# EAGLE board Spring12_6_rev4 (EAGLE 6.1)
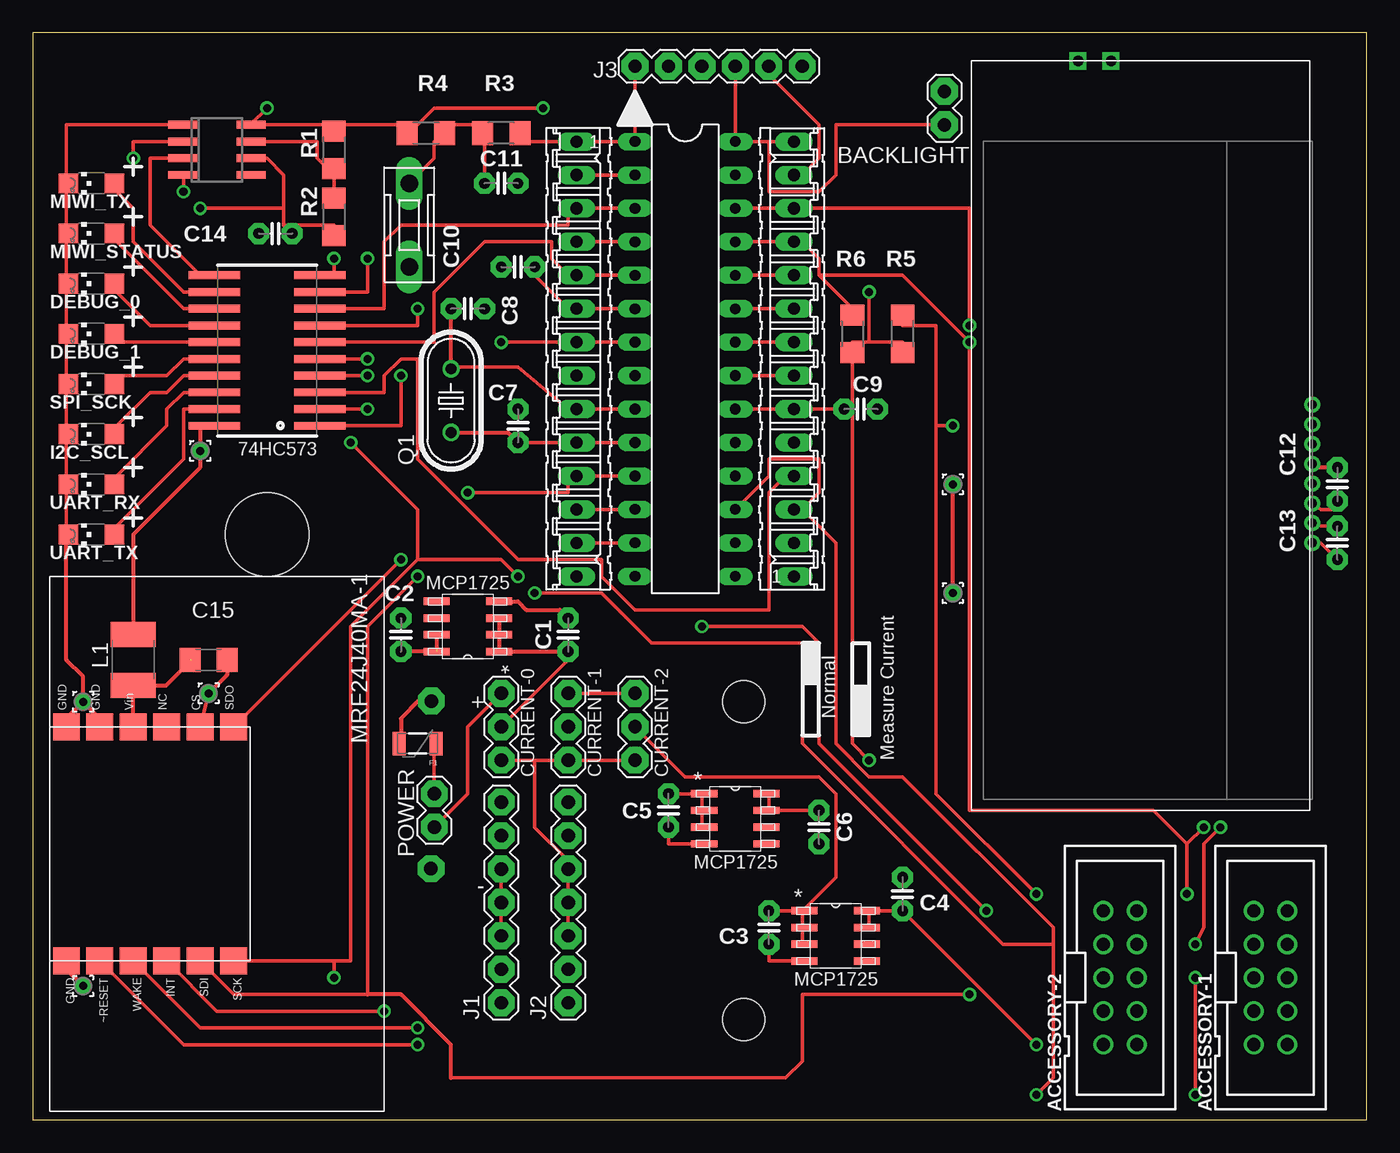
[diagram p0: board, top side]
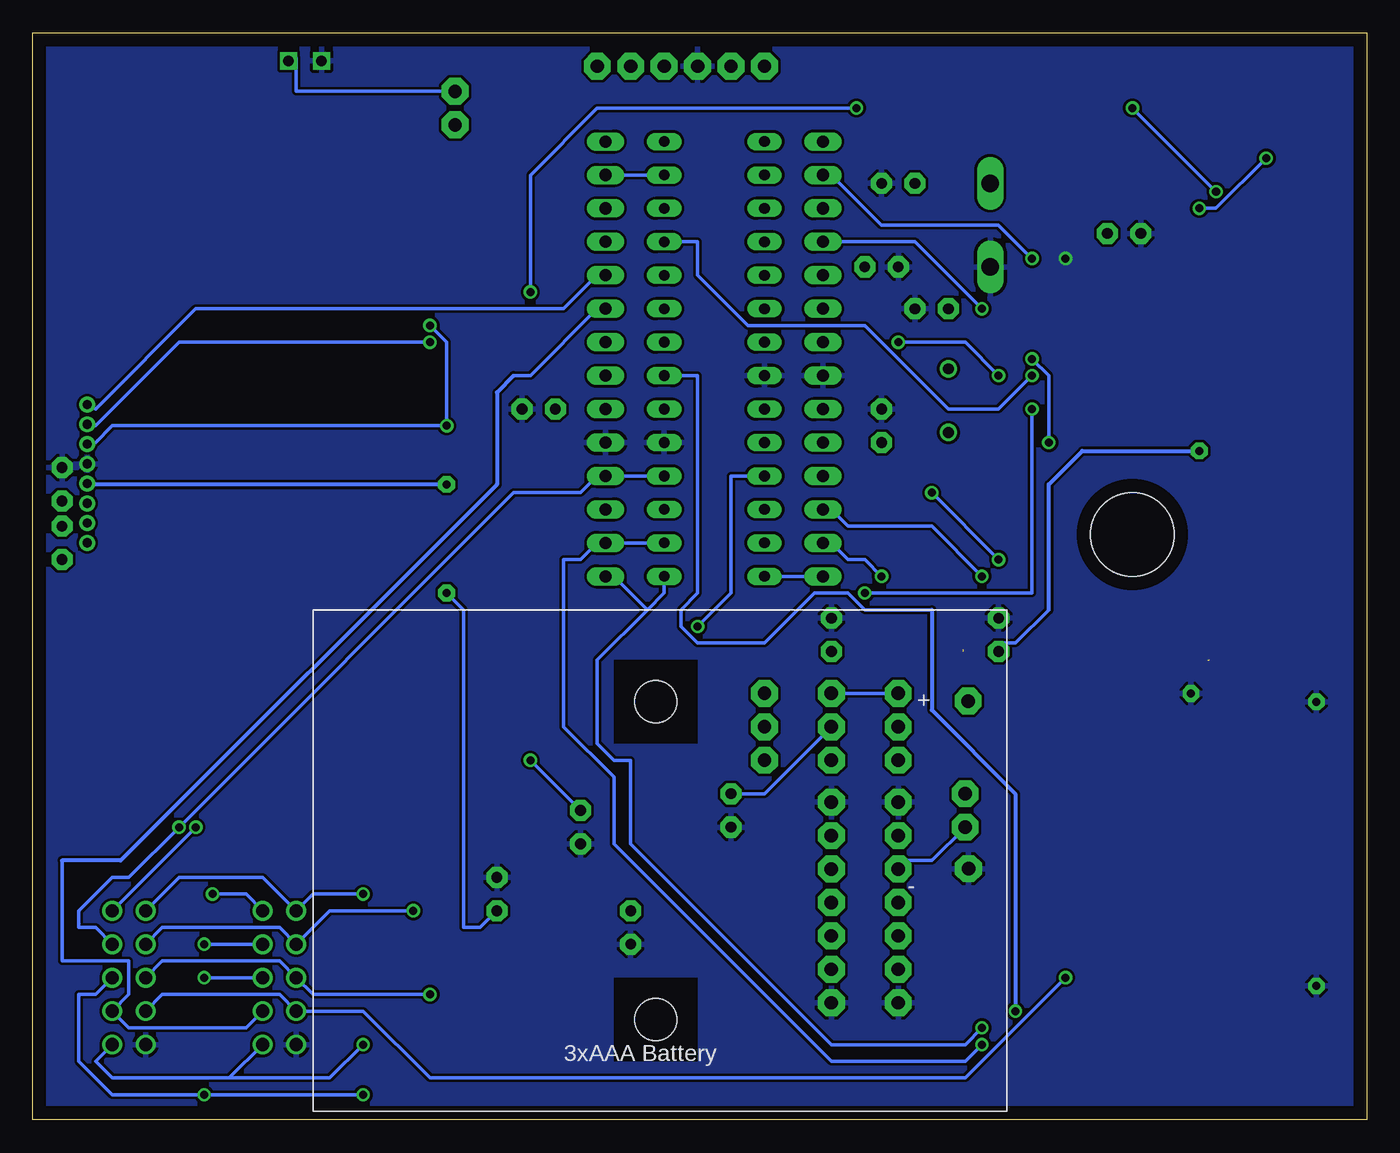
[diagram p1: board, bottom side, seen from below]

Size 101.27 x 82.54 mm. Coordinates in mm from the lower left corner, seen from the top.
Outline: 0,0 101.27,0 101.27,82.54 0,82.54 0,0
Copper layers (1*16): Top 0.035mm / dielectric 1.5mm / Bottom 0.035mm
Design rules: minimum track width 10mil, minimum drill 24mil, track to track 8mil, track to pad 8mil, pad to pad 8mil, via to via 8mil, smd to smd 8mil, copper to edge 40mil, drill to drill 8mil, minimum pad ring 10mil, minimum via ring 8mil, stop-mask expansion 4mil, vias tented up to drill 0mil, thermal gap 10mil
Holes 6.38 mm at 17.78,44.45
tRestrict: area 1.3,13.3 to 16.5,28.6; area 89.5,0.6 to 98.4,21; area 78.1,0.6 to 86.4,21; area 16.5,50.8 to 19.1,64.8; area 13.3,71.1 to 14.6,75.6; area 71.8,24.8 to 97.2,80; area 47.6,40 to 50.8,75.6; area 29.8,52.7 to 33.7,56.5; area 31.7,34.9 to 34.3,40; area 52.1,20.3 to 54.6,25.4; area 59.7,11.4 to 62.2,16.5
bRestrict: area 50.8,28.6 to 57.1,34.9; area 50.8,4.4 to 57.1,10.8
vRestrict: area 14,50.2 to 21.6,66; area 12.1,70.5 to 16.5,76.8; area 29.2,50.8 to 34.3,58.4; area 71.8,23.5 to 98.4,24.8; area 88.9,-0.6 to 99.1,21; area 77.5,-0.6 to 87,21; area 1.3,5.7 to 17.8,33.7

## Footprints (pad centres in the part's own frame; a part is rotated, then mirrored left to right if it is on the bottom)
SO20W = smd 0.6 x 3.9: P$1 -5.715,-4; P$2 -4.445,-4; P$3 -3.175,-4; P$4 -1.905,-4; P$5 -0.635,-4; P$6 0.635,-4; P$7 1.905,-4; P$8 3.175,-4; P$9 4.445,-4; P$10 5.715,-4; P$11 5.715,4; P$12 4.445,4; P$13 3.175,4; P$14 1.905,4; P$15 0.635,4; P$16 -0.635,4; P$17 -1.905,4; P$18 -3.175,4; P$19 -4.445,4; P$20 -5.715,4
2510-6002 = drill 1 pad 1.422: 1 -5.08,-1.27; 2 -5.08,1.27; 3 -2.54,-1.27; 4 -2.54,1.27; 5 0,-1.27; 6 0,1.27; 7 2.54,-1.27; 8 2.54,1.27; 9 5.08,-1.27; 10 5.08,1.27
MA02-1 = drill 1.016 pad 2.032 octagon: 1 -1.27,0; 2 1.27,0
2479-BATTERY = drill 1.016 pad 2.032 octagon: P$1 24.384,-7.01; P$2 24.359,-19.736 | hole 3.2: 0.635,4.445; 0.635,-19.685
C2.5-5 = drill 0.813 pad 1.6 octagon: 1 -1.27,0; 2 1.27,0
C1206 = smd 1.6 x 1.8: 1 -1.4,0; 2 1.4,0
LED1206 = smd 1.5 x 1.5: A 0,-1.75; C 0,1.75
PTC-1206 = smd 1 x 1.8: 1 -1.4,0; 2 1.4,0
SO08 = smd 0.6 x 2.2: 1 -1.905,-2.6; 2 -0.635,-2.6; 3 0.635,-2.6; 4 1.905,-2.6; 5 1.905,2.6; 6 0.635,2.6; 7 -0.635,2.6; 8 -1.905,2.6
MA07-1 = drill 1.016 pad 2.032 octagon: 1 -7.62,0; 2 -5.08,0; 3 -2.54,0; 4 0,0; 5 2.54,0; 6 5.08,0; 7 7.62,0
MA06-1 = drill 1.016 pad 2.032 octagon: 1 -6.35,0; 2 -3.81,0; 3 -1.27,0; 4 1.27,0; 5 3.81,0; 6 6.35,0
L1812 = smd 1.9 x 3.4: 1 -1.95,0; 2 1.95,0
HC49U-V = drill 0.813: 1 -2.413,0; 2 2.413,0
R1206 = smd 1.6 x 1.803: 1 -1.422,0; 2 1.422,0
SOIC8-N_MC = smd 1.981 x 0.559: 1 -2.362,1.905; 2 -2.362,0.635; 3 -2.362,-0.635; 4 -2.362,-1.905; 5 2.362,-1.905; 6 2.362,-0.635; 7 2.362,0.635; 8 2.362,1.905
PCB12 = smd 2.032 x 2.032: 1 -8.89,8.89; 2 -8.89,6.35; 3 -8.89,3.81; 4 -8.89,1.27; 5 -8.89,-1.27; 6 -8.89,-3.81; 7 8.89,-3.81; 8 8.89,-1.27; 9 8.89,1.27; 10 8.89,3.81; 11 8.89,6.35; 12 8.89,8.89
14P = drill 0.914 long: 1 -16.51,0; 2 -13.97,0; 3 -11.43,0; 4 -8.89,0; 5 -6.35,0; 6 -3.81,0; 7 -1.27,0; 8 1.27,0; 9 3.81,0; 10 6.35,0; 11 8.89,0; 12 11.43,0; 13 13.97,0; 14 16.51,0
MA03-1 = drill 1.016 pad 2.032 octagon: 1 -2.54,0; 2 0,0; 3 2.54,0
SW-MOM-PB = drill 1.346 long: 1 0,-3.81; 2 0,2.54
DIL28-3 = drill 0.813 long: 1 -16.51,-3.81; 2 -13.97,-3.81; 3 -11.43,-3.81; 4 -8.89,-3.81; 5 -6.35,-3.81; 6 -3.81,-3.81; 7 -1.27,-3.81; 8 1.27,-3.81; 9 3.81,-3.81; 10 6.35,-3.81; 11 8.89,-3.81; 12 11.43,-3.81; 13 13.97,-3.81; 14 16.51,-3.81; 15 16.51,3.81; 16 13.97,3.81; 17 11.43,3.81; 18 8.89,3.81; 19 6.35,3.81; 20 3.81,3.81; 21 1.27,3.81; 22 -1.27,3.81; 23 -3.81,3.81; 24 -6.35,3.81; 25 -8.89,3.81; 26 -11.43,3.81; 27 -13.97,3.81; 28 -16.51,3.81
SIL8-1.5 = drill 0.7: 1 10.5,0; 2 9,0; 3 7.5,0; 4 6,0; 5 4.5,0; 6 3,0; 7 1.5,0; 8 0,0 | drill 0.8 square: P$1 36.6,15.3; P$2 36.6,17.8
VIA = drill 0.61 pad 1.27 octagon: 1 0,0

## Placement (x,y rotation side)
74HC573  SOIC_20  [SO20W]  17.78,58.42 90 top
ACCESSORY-1  2510-6002  [2510-6002]  93.98,10.79 270 top
ACCESSORY-2  2510-6002  [2510-6002]  82.55,10.79 270 top
BACKLIGHT  MA02-1  [MA02-1]  69.22,76.83 90 top
BATT0  2479-BATTERY  [2479-BATTERY]  54.61,12.06 180 top
C1  10uF  [C2.5-5]  40.64,36.83 90 top
C2  10uF  [C2.5-5]  27.94,36.83 90 top
C3  10uF  [C2.5-5]  55.88,14.61 270 top
C4  10uF  [C2.5-5]  66.04,17.14 90 top
C5  10uF  [C2.5-5]  48.26,23.49 270 top
C6  10uF  [C2.5-5]  59.69,22.22 270 top
C7  18pF  [C2.5-5]  36.83,52.71 90 top
C8  18pF  [C2.5-5]  33.02,61.59 0 top
C9  0.1uF  [C2.5-5]  62.87,53.98 0 top
C10  10uF  [C2.5-5]  36.83,64.77 180 top
C11  0.1uF  [C2.5-5]  35.56,71.12 0 top
C12  1uF  [C2.5-5]  99.06,48.26 90 top
C13  1uF  [C2.5-5]  99.06,43.82 270 top
C14  10uF  [C2.5-5]  18.41,67.31 180 top
C15  100pF  [C1206]  13.34,34.93 0 top
DEBUG_0  LED-SMD-1206  [LED1206]  4.45,63.5 90 top
DEBUG_1  LED-SMD-1206  [LED1206]  4.45,59.69 90 top
F1  2.2A PTC  [PTC-1206]  29.21,28.57 180 top
I2C_SCL  LED-SMD-1206  [LED1206]  4.45,52.07 90 top
IC1  LM555D  [SO08]  13.97,73.66 270 top
J1  [MA07-1]  35.56,16.51 90 top
J2  [MA07-1]  40.64,16.51 90 top
J3  PICKIT  [MA06-1]  52.07,80.01 0 top
L1  10nH  [L1812]  7.62,34.93 90 top
MIWI_STATUS  LED-SMD-1206  [LED1206]  4.45,67.31 90 top
MIWI_TX  LED-SMD-1206  [LED1206]  4.45,71.12 90 top
POWER  MA02-1  [MA02-1]  30.48,23.49 270 top
Q1  20MHz  [HC49U-V]  31.75,54.61 270 top
R1  510  [R1206]  22.86,73.66 90 top
R2  1k  [R1206]  22.86,68.58 90 top
R3  470  [R1206]  35.56,74.93 0 top
R4  10k  [R1206]  29.84,74.93 180 top
R5  10K  [R1206]  66.04,59.69 270 top
R6  10K  [R1206]  62.23,59.69 90 top
REG0  MCP1725-XXXXX/SN  [SOIC8-N_MC]  53.34,22.86 0 top
REG1  MCP1725-XXXXX/SN  [SOIC8-N_MC]  33.02,37.47 180 top
REG2  MCP1725-XXXXX/SN  [SOIC8-N_MC]  60.96,13.97 0 top
RF0  MRF24J40MA  [PCB12]  11.43,20.95 90 top
SL1  [14P]  57.78,57.79 90 top
SL2  [14P]  41.27,57.79 270 top
SPI_SCK  LED-SMD-1206  [LED1206]  4.45,55.88 90 top
SV3  [MA03-1]  40.64,29.84 90 top
SV4  [MA03-1]  35.56,29.84 90 top
SV5  [MA03-1]  45.72,29.84 90 top
SW0  SW-PB-MOM  [SW-MOM-PB]  28.57,68.58 0 top
U$1  PIC18F26J50  [DIL28-3]  49.53,57.79 270 top
U$2  NHD-C0216CIZ-FSW-FBW-3V3  [SIL8-1.5]  97.16,43.82 90 top
U$3  VIA  [VIA]  69.85,48.26 0 top
U$4  VIA  [VIA]  69.85,40.01 0 top
U$5  VIA  [VIA]  12.7,50.8 0 top
U$18  VIA  [VIA]  3.81,10.16 0 top
U$19  VIA  [VIA]  3.81,31.75 0 top
U$20  VIA  [VIA]  13.34,32.39 0 top
UART_RX  LED-SMD-1206  [LED1206]  4.45,48.26 90 top
UART_TX  LED-SMD-1206  [LED1206]  4.45,44.45 90 top

## Library data of the parts
74HC573 = SparkFun
ACCESSORY-1 ACCESSORY-2 C1-C7 C14 DEBUG_0 DEBUG_1 I2C_SCL MIWI_STATUS MIWI_TX R1-R6 SPI_SCK U$3-U$5 U$18-U$20 UART_RX UART_TX = 4534_I2C2
BACKLIGHT IC1 J1-J3 POWER SW0 U$1 = 4534
BATT0 RF0 = 4534_Node_Board
C8-C13 = 4534_I2C2; DIGIKEY: 490-3632-ND
C15 = rcl; MOUSER: 810-CGA5C4C0G2J101J
F1 = SparkFun; DIGIKEY: F3366CT-ND; IHOLD: 1.10 A; ITRIP: 2.2A
L1 = rcl; MOUSER: 70-IMC1812BN100K
Q1 = crystal; DIGIKEY: XC1723-ND; OC_FARNELL: 1666969; OC_NEWARK: unknown
REG0 REG1 REG2 = 4534_Node_Board; NEWARK: MCP1725-3002E/SN
SL1 SL2 = con-amp-quick; OC_FARNELL: unknown; OC_NEWARK: unknown
SV3-SV5 = 4534; OC_FARNELL: unknown; OC_NEWARK: unknown
U$2 = nhd-cog

## Nets
BATT: BATT0.P$2 F1.2
CURRENT: J2.3 J2.4 J2.5 SV3.1 SV4.1 SV5.1
DEBUG_0: 74HC573.P$7 SL2.4 U$1.4
DEBUG_1: 74HC573.P$6 SL2.5 U$1.5
GPIO: ACCESSORY-1.8 ACCESSORY-2.8 SL1.9 U$1.23
I2C_SCL: 74HC573.P$4 ACCESSORY-1.2 ACCESSORY-2.2 R6.2 SL1.11 U$1.25 U$2.2
I2C_SDA: ACCESSORY-1.1 ACCESSORY-2.1 R5.1 SL1.12 U$1.26 U$2.3
LATCH_ENABLE: 74HC573.P$11 IC1.3
LCD_RESET: SL1.10 U$1.24 U$2.1
MCLR: J3.1 R3.2 SL2.1 U$1.1
MIWI-VDD: C15.1 L1.1 RF0.10
MIWI_STATUS: 74HC573.P$8 SL2.3 U$1.3
MIWI_TX: 74HC573.P$9 SL2.2 U$1.2
MRF-INT: RF0.4 SL1.7 U$1.21
MRF-RESET: RF0.2 SL1.2 U$1.16
MRF-WAKE: RF0.3 SL1.1 U$1.15
N$1: BACKLIGHT.2 U$2.P$1
N$2: IC1.7 R1.1 R2.2
N$3: C14.1 IC1.2 IC1.6 R2.1
N$6: C11.1 R3.1 R4.1 SW0.2
N$7: J1.6
N$8: C12.1 U$2.6
N$9: C13.1 U$2.7
N$10: C13.2 U$2.8
N$12: F1.1 POWER.1
N$14: J1.2
N$17: J2.6
N$21: J2.2
OSC1: C8.1 Q1.1 SL2.9 U$1.9
OSC2: C7.1 Q1.2 SL2.10 U$1.10
PGC: J3.5 SL1.13 U$1.27
PGD: BACKLIGHT.1 J3.4 SL1.14 U$1.28
PICKIT-AUX: J3.6
PICKIT-VDD: J3.2
PWM-0: 74HC573.P$1 SL2.7 U$1.7
Q0: 74HC573.P$19 UART_TX.A
Q1: 74HC573.P$18 UART_RX.A
Q2: 74HC573.P$17 I2C_SCL.A
Q3: 74HC573.P$16 SPI_SCK.A
Q4: 74HC573.P$15 DEBUG_1.A
Q5: 74HC573.P$14 DEBUG_0.A
Q6: 74HC573.P$13 MIWI_STATUS.A
Q7: 74HC573.P$12 MIWI_TX.A
SPI_MISO: ACCESSORY-1.3 ACCESSORY-2.3 RF0.7 SL2.11 U$1.11
SPI_MOSI: ACCESSORY-1.5 ACCESSORY-2.5 RF0.5 SL2.12 U$1.12
SPI_SCK: 74HC573.P$5 ACCESSORY-1.7 ACCESSORY-2.7 RF0.6 SL2.13 U$1.13
UART_RX: 74HC573.P$3 ACCESSORY-1.4 ACCESSORY-2.4 SL1.4 U$1.18
UART_TX: 74HC573.P$2 ACCESSORY-1.6 ACCESSORY-2.6 SL1.3 U$1.17
UNUSED-0: SL1.8 U$1.22
UNUSED-1: SL2.14 U$1.14
VCC_BATT: J1.3 J1.4 J1.5 POWER.2 SV3.3 SV4.3 SV5.3
VCC_REG0: C5.1 REG0.1 REG0.2 REG0.3 SV3.2
VCC_REG1: C1.1 REG1.1 REG1.2 REG1.3 SV4.2
VCC_REG2: C3.1 REG2.1 REG2.2 REG2.3 SV5.2
VDD_ACC: ACCESSORY-1.10 ACCESSORY-2.10 C4.1 REG2.7 REG2.8 U$2.5 U$3.1 U$4.1
VDD_MIWI: 74HC573.P$20 C2.1 L1.2 REG1.7 REG1.8 U$5.1
VDD_PIC: C6.1 C9.1 IC1.4 IC1.8 R1.2 R4.2 R5.2 R6.1 REG0.7 REG0.8 SL1.6 U$1.20
VDDCORE: C10.1 SL2.6 U$1.6
VSS: 74HC573.P$10 ACCESSORY-1.9 ACCESSORY-2.9 BATT0.P$1 C1.2 C2.2 C3.2 C4.2 C5.2 C6.2 C7.2 C8.2 C9.2 C10.2 C11.2 C12.2 C14.2 C15.2 DEBUG_0.C DEBUG_1.C I2C_SCL.C IC1.1 J1.1 J1.7 J2.1 J2.7 J3.3 MIWI_STATUS.C MIWI_TX.C REG0.4 REG1.4 REG2.4 RF0.1 RF0.8 RF0.11 RF0.12 SL1.5 SL2.8 SPI_SCK.C SW0.1 U$1.8 U$1.19 U$2.4 U$2.P$2 U$18.1 U$19.1 U$20.1 UART_RX.C UART_TX.C

## Tracks (layer width: path | path; a pad name or v marks a point on that pad's centre or on a via)
BATT
  Top 0.254: 27.94,28.57 F1.2
  Top 0.305: BATT0.P$2 29.26,31.8 27.94,30.48 27.94,28.57
CURRENT
  Top 0.254: J2.3 J2.4 J2.5 40.64,19.68 38.1,22.22 38.1,27.3 | 38.1,27.3 SV3.1 SV5.1 | 38.1,27.3 SV4.1
DEBUG_0  (via drill 0.61)
  Top 0.254: SL2.4 U$1.4 | 74HC573.P$7 29.21,60.33 v29.21,61.59
  Bottom 0.254: v29.21,61.59 34.29,66.67 SL2.4
DEBUG_1
  Top 0.254: U$1.5 SL2.5 40.64,64.13 39.37,65.41 39.37,66.67 34.29,66.67 30.48,62.87 30.48,59.05 74HC573.P$6
GPIO
  Top 0.254: SL1.9 U$1.23
  Bottom 0.254: ACCESSORY-2.8 85.09,6.99 93.98,6.99 ACCESSORY-1.8 93.98,9.53 93.98,12.06 99.06,12.06 99.06,19.68 | 64.77,56.52 63.5,56.52 58.42,61.59 SL1.9
  Bottom 0.305: 64.77,56.52 66.04,55.25 66.04,48.26 94.61,19.68 99.06,19.68
I2C_SCL  (via drill 0.61)
  Top 0.254: 59.69,64.13 62.23,61.59 R6.2 | 59.69,64.13 59.69,65.41 58.42,66.67 SL1.11 U$1.25 | 59.69,64.13 66.04,64.13 v71.12,59.05 71.12,23.49 85.09,23.49 87.63,20.95 | 87.63,20.95 v87.63,17.14 | 87.63,20.95 v88.9,22.22 | v25.4,56.52 74HC573.P$4
  Bottom 0.254: v71.12,59.05 90.17,59.05 96.52,52.71 U$2.2 | ACCESSORY-2.2 85.09,17.14 v87.63,17.14 | v88.9,22.22 ACCESSORY-1.2 | v25.4,56.52 27.94,53.98 31.75,53.98 38.1,60.33 46.99,60.33 50.8,64.13 50.8,66.67 U$1.25
I2C_SDA  (via drill 0.61)
  Top 0.254: U$1.26 SL1.12 71.12,69.21 v71.12,60.33 | 68.58,52.71 68.58,24.76 v76.2,17.14 | 68.58,52.71 68.58,60.33 66.04,60.33 R5.1 | 68.58,52.71 v69.85,52.71
  Bottom 0.254: v76.2,17.14 80.01,17.14 ACCESSORY-2.1 83.82,18.41 90.17,18.41 ACCESSORY-1.1 | U$2.3 96.52,51.44 95.25,52.71 v69.85,52.71 69.85,59.05 v71.12,60.33
LATCH_ENABLE
  Top 0.254: 11.43,73.02 IC1.3 8.89,73.02 8.89,67.94 12.7,64.13 74HC573.P$11
LCD_RESET
  Top 0.254: SL1.10 U$1.24
  Bottom 0.254: U$2.1 96.52,53.98 88.9,61.59 60.96,61.59 58.42,64.13 SL1.10
MCLR
  Top 0.254: R3.2 36.83,74.3 SL2.1 U$1.1 J3.1
MIWI-VDD  (1 unrouted)
  Top 0.305: RF0.10 L1.1 | L1.1 7.62,33.02 | L1.1 10.12,32.98 12.06,34.93
MIWI_STATUS
  Top 0.254: U$1.3 SL2.3 40.64,69.21 40.64,67.94 27.94,67.94 26.67,66.67 26.67,61.59 74HC573.P$8
MIWI_TX  (via drill 0.61)
  Top 0.254: SL2.2 U$1.2 | 74HC573.P$9 25.4,62.87 v25.4,65.41
  Bottom 0.254: v25.4,65.41 27.94,67.94 36.83,67.94 40.64,71.75 SL2.2
MRF-INT  (via drill 0.61)
  Top 0.254: RF0.4 13.97,8.26 v26.67,8.26 | U$1.21 SL1.7
  Bottom 0.254: 33.02,38.73 38.1,38.73 39.37,40.01 41.91,40.01 45.72,36.2 50.8,36.2 52.07,37.47 52.07,38.73 50.8,40.01 50.8,56.52 U$1.21
  Bottom 0.305: v26.67,8.26 26.67,24.76 33.02,31.11 33.02,38.73
MRF-RESET  (via drill 0.61)
  Top 0.254: RF0.2 11.43,5.71 v29.21,5.71
  Bottom 0.254: v29.21,5.71 30.48,4.45 40.64,4.45 57.15,20.95 57.15,26.04 60.96,29.84 60.96,42.55 59.69,42.55 58.42,43.82 SL1.2 U$1.16
MRF-WAKE  (via drill 0.61)
  Top 0.254: RF0.3 12.7,6.99 v29.21,6.99
  Bottom 0.254: v29.21,6.99 30.48,5.71 40.64,5.71 55.88,20.95 55.88,27.3 57.15,27.3 58.42,28.57 58.42,34.93 54.61,38.73 | 54.61,38.73 53.34,40.01 U$1.15 | 54.61,38.73 57.15,41.27 SL1.1
N$1
  Bottom 0.254: BACKLIGHT.2 81.28,78.1 81.28,80.64 U$2.P$1
N$2
  Top 0.254: 22.86,71.75 R2.2 | 22.86,71.75 21.59,73.02 21.59,74.3 IC1.7 16.51,74.3 | 22.86,71.75 R1.1
N$3  (via drill 0.61)
  Top 0.254: 19.05,69.21 19.05,71.75 17.78,73.02 IC1.6 16.51,73.02 | 19.05,69.21 19.05,67.94 22.86,67.94 R2.1 | v7.62,73.02 7.62,74.3 IC1.2 11.43,74.3 | 19.05,69.21 v12.7,69.21
  Top 0.305: C14.1 19.05,67.94
  Bottom 0.254: v7.62,73.02 11.43,69.21 v12.7,69.21
N$6
  Top 0.254: C11.1 34.29,74.3 R3.1 34.29,75.56 31.75,75.56 R4.1 30.48,74.3 30.48,73.02 SW0.2
N$8
  Top 0.254: U$2.6 97.79,46.36 99.06,46.36 C12.1
N$9
  Top 0.254: C13.1 97.79,45.09 U$2.7
N$10
  Top 0.254: C13.2 97.79,43.82 U$2.8
N$12
  Top 0.254: POWER.1 30.48,28.57 F1.1
OSC1
  Top 0.254: U$1.9 SL2.9 40.64,53.98 36.83,57.15 31.75,57.15
  Top 0.305: Q1.1 31.75,57.15 C8.1
OSC2
  Top 0.254: U$1.10 SL2.10 C7.1
  Top 0.305: Q1.2 36.07,52.2 C7.1
PGC
  Top 0.254: J3.5 55.88,79.38 59.69,75.56 59.69,73.02 58.42,71.75 SL1.13
  Bottom 0.254: SL1.13 U$1.27
PGD
  Top 0.254: SL1.14 55.88,74.3 | 55.88,74.3 U$1.28 J3.4 | BACKLIGHT.1 60.96,75.56 60.96,71.75 59.69,70.48 55.88,70.48 55.88,74.3
PWM-0  (via drill 0.61)
  Top 0.254: U$1.7 SL2.7 v35.56,59.05 | 74HC573.P$1 27.94,52.71 v27.94,56.52
  Bottom 0.254: v27.94,56.52 30.48,59.05 v35.56,59.05
Q0
  Top 0.254: 74HC573.P$19 11.43,53.98 11.43,50.16 6.35,45.09 UART_TX.A
Q1
  Top 0.254: 74HC573.P$18 11.43,55.25 10.16,53.98 10.16,52.71 6.35,48.9 UART_RX.A
Q2
  Top 0.254: 74HC573.P$17 11.43,56.52 10.16,55.25 8.89,55.25 6.35,52.71 I2C_SCL.A
Q3
  Top 0.254: 74HC573.P$16 11.43,57.79 10.16,56.52 6.35,56.52 SPI_SCK.A
Q4
  Top 0.254: 74HC573.P$15 6.35,59.05 DEBUG_1.A
Q5
  Top 0.254: 74HC573.P$14 8.89,60.33 6.35,62.87 DEBUG_0.A
Q6
  Top 0.254: 74HC573.P$13 11.43,61.59 6.35,66.67 MIWI_STATUS.A
Q7
  Top 0.254: 74HC573.P$12 11.43,62.87 7.62,66.67 7.62,69.21 6.35,70.48 MIWI_TX.A
SPI_MISO  (via drill 0.61)
  Top 0.254: v27.94,42.55 RF0.7 | v33.02,47.62 40.64,47.62 40.64,48.9 SL2.11 U$1.11 | v72.39,15.88 59.69,28.57 59.69,36.2 58.42,37.47 v50.8,37.47
  Bottom 0.254: ACCESSORY-1.3 91.44,14.61 82.55,14.61 ACCESSORY-2.3 78.74,15.88 v72.39,15.88 | v33.02,47.62 v27.94,42.55 | v50.8,37.47 48.26,40.01 48.26,48.9 U$1.11
SPI_MOSI  (via drill 0.61)
  Top 0.254: RF0.5 15.24,9.53 25.4,9.53 25.4,37.47 v29.21,41.27 | SL2.12 U$1.12 | v71.12,9.53 58.42,9.53 58.42,4.45 57.15,3.17 31.75,3.17
  Top 0.305: 31.75,3.17 31.75,5.71 27.94,9.53 25.4,9.53
  Bottom 0.254: ACCESSORY-1.5 91.44,12.06 82.55,12.06 ACCESSORY-2.5 80.01,9.53 v71.12,9.53 | v29.21,41.27 33.02,45.09 39.37,45.09 40.64,46.36 SL2.12
SPI_SCK  (via drill 0.61)
  Top 0.254: 22.86,12.06 24.13,12.06 24.13,37.47 29.21,42.55 | 22.86,12.06 RF0.6 | 29.21,42.55 35.56,42.55 v36.83,41.27 | SL2.13 U$1.13 | v25.4,57.79 74HC573.P$5 | v24.13,51.44 29.21,46.36 29.21,42.55 | 22.86,12.06 v22.86,10.79
  Bottom 0.254: ACCESSORY-1.7 91.44,9.53 82.55,9.53 ACCESSORY-2.7 76.2,8.26 71.12,3.17 30.48,3.17 v22.86,10.79 | v36.83,41.27 38.1,42.55 39.37,42.55 40.64,43.82 SL2.13 | v25.4,57.79 24.13,56.52 v24.13,51.44
UART_RX  (via drill 0.61)
  Top 0.254: v88.27,13.34 88.9,14.61 88.9,20.95 v90.17,22.22 | 74HC573.P$3 26.67,55.25 26.67,56.52 27.94,57.79 29.21,57.79 29.21,50.16 36.83,42.55 43.18,42.55 43.18,41.27 45.72,38.73 55.88,38.73 55.88,47.62 57.15,48.9 SL1.4
  Bottom 0.254: v88.27,13.34 ACCESSORY-2.4 | ACCESSORY-1.4 96.52,14.61 97.79,14.61 97.79,15.88 95.25,18.41 93.98,18.41 v90.17,22.22 64.77,47.62 59.69,47.62 58.42,48.9 SL1.4 U$1.18
UART_TX  (via drill 0.61)
  Top 0.254: v88.27,1.91 v88.27,10.79 | U$1.17 55.88,48.9 55.88,50.16 59.69,50.16 59.69,47.62 58.42,46.36 | v25.4,53.98 74HC573.P$2 | v38.1,40.01 43.18,40.01 46.99,36.2 58.42,36.2 58.42,28.57 73.66,13.34 77.47,13.34 | 77.47,13.34 77.47,14.61 66.04,26.04 63.5,26.04 60.96,28.57 60.96,43.82 58.42,46.36 | 58.42,46.36 SL1.3 | v76.2,1.91 77.47,3.17 77.47,13.34
  Bottom 0.254: v88.27,10.79 ACCESSORY-2.6 | ACCESSORY-1.6 96.52,9.53 97.79,9.53 97.79,4.45 95.25,1.91 v88.27,1.91 v76.2,1.91 | v25.4,53.98 25.4,40.01 v38.1,40.01
UNUSED-0
  Top 0.254: SL1.8 U$1.22
UNUSED-1
  Bottom 0.254: SL2.14 U$1.14
VCC_BATT
  Top 0.254: J1.3 J1.4 J1.5 | SV3.3 SV5.3 | POWER.2 33.02,24.76 33.02,29.84 SV4.3
  Bottom 0.254: POWER.2 33.02,19.68 35.56,19.68 J1.5 | SV3.3 SV4.3
VCC_REG0
  Top 0.254: 50.8,23.49 50.8,22.22 REG0.3 | 50.8,23.49 50.8,24.76 | 50.8,23.49 REG0.2 | C5.1 50.8,24.76 | 50.8,24.76 REG0.1
  Bottom 0.254: SV3.2 45.72,24.76 C5.1
VCC_REG1
  Top 0.254: SV4.2 40.64,34.93 C1.1
  Top 0.305: REG1.3 REG1.2 REG1.1 C1.1
VCC_REG2
  Top 0.254: 58.42,14.61 58.42,13.34 REG2.3 | 58.42,14.61 58.42,15.88 | 58.42,14.61 REG2.2 | C3.1 58.42,15.88 | SV5.2 49.53,26.04 59.69,26.04 60.96,24.76 60.96,18.41 58.42,15.88 | 58.42,15.88 REG2.1
VDD_ACC  (via drill 0.61)
  Top 0.254: 63.5,15.88 63.5,14.61 REG2.7 | 63.5,15.88 C4.1 v76.2,5.71 | 63.5,15.88 REG2.8
  Top 0.305: U$4.1 U$3.1
  Bottom 0.254: 86.36,3.17 ACCESSORY-2.10 | 86.36,3.17 95.25,3.17 96.52,4.45 ACCESSORY-1.10 | v76.2,5.71 78.74,3.17 86.36,3.17 | U$4.1 68.58,38.73 68.58,14.61 67.31,14.61 C4.1
  Bottom 0.305: U$3.1 97.1,48.26 U$2.5
VDD_MIWI  (1 unrouted)
  Top 0.254: 12.7,52.71 74HC573.P$20
  Top 0.305: 12.7,52.71 U$5.1 12.7,49.53 7.62,44.45 7.62,37.47 L1.2 7.62,36.83 | REG1.7 30.66,35.74 30.48,35.56 C2.1
  Bottom 0.254: 24.13,38.73 26.67,36.2 27.94,36.2 C2.1
  Bottom 0.305: 24.13,38.73 24.13,48.26 21.59,50.8 U$5.1
VDD_PIC  (via drill 0.61)
  Top 0.254: 22.86,75.56 27.94,75.56 R4.2 29.21,75.56 30.48,76.83 v38.73,76.83 | v11.43,70.48 11.43,71.75 IC1.4 | v17.78,76.83 16.51,75.56 IC1.8 22.86,75.56 | 22.86,75.56 R1.2 | 55.88,23.49 55.88,24.76 REG0.8 | C6.1 55.88,23.49 | 55.88,23.49 REG0.7 | U$1.20 SL1.6 C9.1 62.23,53.98 | 63.5,59.05 66.04,59.05 R5.2 | 63.5,59.05 62.23,59.05 R6.1 62.23,53.98 | v63.5,27.3 62.23,28.57 62.23,53.98 | 63.5,59.05 v63.5,62.87
  Bottom 0.254: v17.78,76.83 v11.43,70.48 | v63.5,27.3 C6.1 | v38.73,76.83 58.42,76.83 63.5,71.75 v63.5,62.87
VDDCORE
  Top 0.254: U$1.6 SL2.6 40.64,61.59 38.1,64.13 C10.1
VSS  (via drill 0.61)
  Top 0.254: 11.43,75.56 IC1.1 2.54,75.56 2.54,71.75 MIWI_TX.C 2.54,70.48 2.54,67.94 MIWI_STATUS.C 2.54,66.67 2.54,64.13 DEBUG_0.C 2.54,62.87 2.54,60.33 DEBUG_1.C 2.54,59.05 2.54,56.52 SPI_SCK.C 2.54,55.25 2.54,52.71 I2C_SCL.C 2.54,51.44 2.54,48.9 UART_RX.C 2.54,47.62 2.54,45.09 UART_TX.C 2.54,43.82 | REG2.4 55.88,12.06 C3.2 | REG0.4 48.26,20.95 C5.2 | U$20.1 RF0.8 | v22.86,65.41 22.86,64.13 74HC573.P$10
  Top 0.305: RF0.12 2.54,30.48 U$19.1 | U$19.1 5.08,30.48 RF0.11 | U$19.1 3.81,33.66 2.54,34.93 2.54,44.3 UART_TX.C | RF0.1 2.54,11.43 U$18.1 | REG1.4 36.83,39.37 37.47,38.73 40.01,38.73 C1.2 | C15.2 14.73,33.79 U$20.1 | C12.2 97.16,49.53
  pour Bottom: 0,82.55 100.97,82.55 101.6,0 0,0

## Text on the board
tPlace: Normal | Measure Current
tNames: MCP1725 | CURRENT-0 | CURRENT-1 | CURRENT-2 | MCP1725 | MCP1725